# EAGLE board GetWired MCU v1.0 (EAGLE 9.5.1)
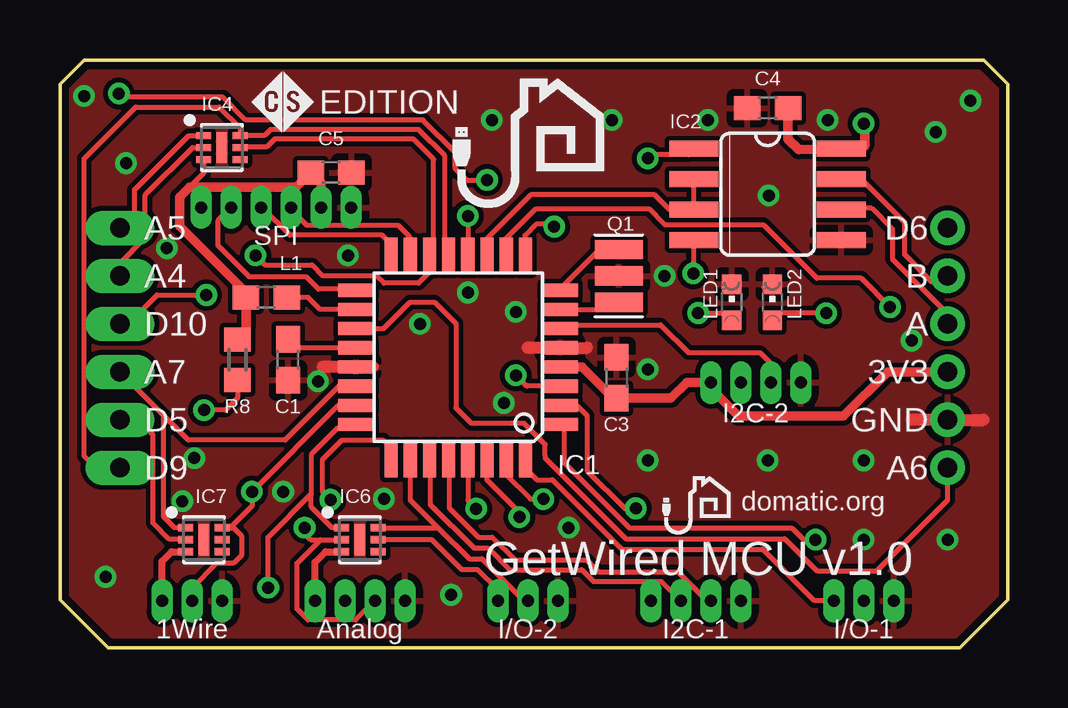
[diagram p0: board, top side]
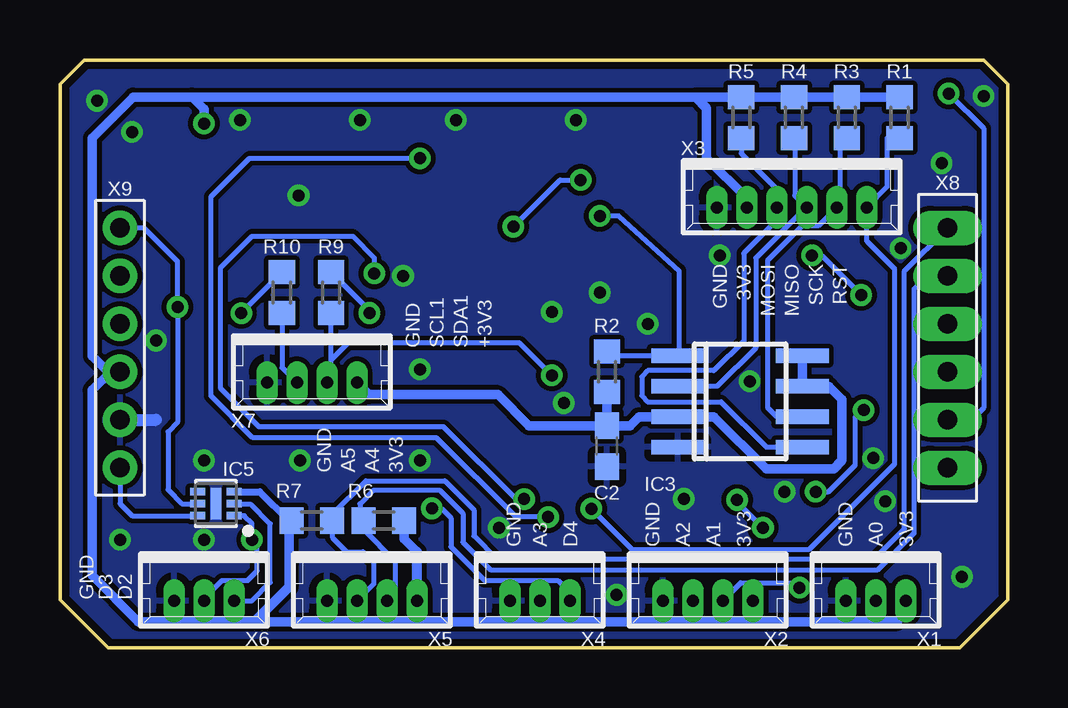
[diagram p1: board, bottom side, seen from below]

Size 39.5 x 24.5 mm. Coordinates in mm from the lower left corner, seen from the top.
Outline: 0,2 0,23.5 1,24.5 38.5,24.5 39.5,23.5 39.5,2 37.5,0 2,0 0,2
Copper layers (1*16): Top 0.035mm / dielectric 1.5mm / Bottom 0.035mm
Design rules "default *": minimum track width 0.2mm, minimum drill 0.5mm, track to track 0.2mm, track to pad 0.2mm, pad to pad 0.2mm, via to via 0.2mm, smd to smd 0.2mm, copper to edge 0.3mm, drill to drill 0.2mm, minimum pad ring 0.2mm, minimum via ring 0.2mm, stop-mask expansion 0.025mm, vias tented up to drill 0.5mm, thermal gap 0.3mm
Net classes: 0 default: width 0.2 mm, drill 0.5 mm, clearance 0.15 mm; 1 zasilanie: width 0.2 mm, drill 0.5 mm, clearance 0.15 mm; 2 230v: width 1.5 mm, drill 1 mm, clearance 2 mm

## Footprints (pad centres in the part's own frame; a part is rotated, then mirrored left to right if it is on the bottom)
C0603 = smd 1.1 x 1: 1 -0.85,0; 2 0.85,0
TQFP32-08-REF = smd 1.5 x 0.55: 1 -4.25,2.8; 2 -4.25,2; 3 -4.25,1.2; 4 -4.25,0.4; 5 -4.25,-0.4; 6 -4.25,-1.2; 7 -4.25,-2; 8 -4.25,-2.8; 17 4.25,-2.8; 18 4.25,-2; 19 4.25,-1.2; 20 4.25,-0.4; 21 4.25,0.4; 22 4.25,1.2; 23 4.25,2; 24 4.25,2.8 | smd 0.55 x 1.5: 9 -2.8,-4.25; 10 -2,-4.25; 11 -1.2,-4.25; 12 -0.4,-4.25; 13 0.4,-4.25; 14 1.2,-4.25; 15 2,-4.25; 16 2.8,-4.25; 25 2.8,4.25; 26 2,4.25; 27 1.2,4.25; 28 0.4,4.25; 29 -0.4,4.25; 30 -1.2,4.25; 31 -2,4.25; 32 -2.8,4.25
SO08 = smd 0.66 x 2.032: 1 -1.905,-3.073; 2 -0.635,-3.073; 3 0.635,-3.073; 4 1.905,-3.073; 5 1.905,3.073; 6 0.635,3.073; 7 -0.635,3.073; 8 -1.905,3.073
SO-08 = smd 0.6 x 2.2: 1 -1.905,-2.6; 2 -0.635,-2.6; 3 0.635,-2.6; 4 1.905,-2.6; 5 1.905,2.6; 6 0.635,2.6; 7 -0.635,2.6; 8 -1.905,2.6
SON50P160X160X65-7T45X130-V2 = smd 0.63 x 0.3: 1 -0.76,0.5; 2 -0.76,0; 3 -0.76,-0.5; 4 0.76,-0.5; 5 0.76,0; 6 0.76,0.5 | smd 0.45 x 1.3: 7 0,0
C1608 = smd 1.1 x 1: 1 -0.85,0; 2 0.85,0
CHIPLED_0603 = smd 0.8 x 0.8: A 0,-0.75; C 0,0.75
CSTCE_V_C = smd 0.8 x 2: GND 0,0; X1 -1.1,0; X2 1.1,0
R0603 = smd 1 x 1.1: 1 -0.85,0; 2 0.85,0
53047-03 = drill 0.5 pad 0.698 long: 1 1.25,0.45; 2 0,0.45; 3 -1.25,0.45
53047-04 = drill 0.5 pad 0.698 long: 1 1.875,0.45; 2 0.625,0.45; 3 -0.625,0.45; 4 -1.875,0.45
53047-06 = drill 0.5 pad 0.698 long: 1 3.125,0.45; 2 1.875,0.45; 3 0.625,0.45; 4 -0.625,0.45; 5 -1.875,0.45; 6 -3.125,0.45
1X6-FEMALE-LONG = drill 0.8 long: 1 -5,0; 2 -3,0; 3 -1,0; 4 1,0; 5 3,0; 6 5,0
HDRV6W50P200_1X6_1200X200X600B = drill 0.8: 1 0,0; 2 2,0; 3 4,0; 4 6,0; 5 8,0; 6 10,0

## Placement (x,y rotation side)
C1  100nF  [C0603]  9.5,12 90 top
C2  100nF  [C0603]  16.7,8.4 90 bottom
C3  100nF  [C0603]  23.2,11.25 270 top
C4  100nF  [C0603]  29.5,22.5 180 top
C5  100nF  [C0603]  11.3,19.8 0 top
IC1  ATMEGA328PB-AU  [TQFP32-08-REF]  16.6,12.1 180 top
IC2  ST3485EBDR  [SO08]  29.5,18.9 270 top
IC3  AT25DN512C-SSHF-B  [SO-08]  11.15,10.26 270 bottom
IC4  RCLAMP3304P.TCT  [SON50P160X160X65-7T45X130-V2]  6.75,20.85 0 top
IC5  RCLAMP3304P.TCT  [SON50P160X160X65-7T45X130-V2]  33,6 180 bottom
IC6  RCLAMP3304P.TCT  [SON50P160X160X65-7T45X130-V2]  12.5,4.5 0 top
IC7  RCLAMP3304P.TCT  [SON50P160X160X65-7T45X130-V2]  6,4.5 0 top
L1  10uH  [C1608]  8.6,14.6 0 top
LED1  LL-S170VC-V1-1B  [CHIPLED_0603]  28,14.4 0 top
LED2  LL-S170VC-V1-1B  [CHIPLED_0603]  29.7,14.4 0 top
Q1  CSTCE8M00G52A-R0  [CSTCE_V_C]  23.3,15.5 90 top
R1  10k  [R0603]  4.5,22.1 90 bottom
R2  56k  [R0603]  16.7,11.5 90 bottom
R3  10k  [R0603]  6.7,22.1 90 bottom
R4  10k  [R0603]  8.9,22.1 90 bottom
R5  10k  [R0603]  11.1,22.1 90 bottom
R6  4.7k  [R0603]  26,5.3 0 bottom
R7  4.7k  [R0603]  29,5.3 180 bottom
R8  4.7k  [R0603]  7.4,12 90 top
R9  1.5k  [R0603]  28.2,14.8 270 bottom
R10  1.5k  [R0603]  30.25,14.8 270 bottom
U$1  [CS2-2.5MM]  8,21.5 0 top
U$2  [LOGO5MMBEZ]  16.35,18.3 0 top
U$3  [LOGO2.5MMNAP0,8]  25.1,4.7 0 top
X1  53047-0310  [53047-03]  5.5,2.4 180 bottom
X2  53047-0410  [53047-04]  12.5,2.4 180 bottom
X3  53047-0610  [53047-06]  9,18.8 180 bottom
X4  53047-0310  [53047-03]  19.5,2.4 180 bottom
X5  53047-0410  [53047-04]  26.5,2.4 180 bottom
X6  53047-0310  [53047-03]  33.5,2.4 180 bottom
X7  53047-0410  [53047-04]  29,11.5 180 bottom
X8  PBMS06S-LF  [1X6-FEMALE-LONG]  2.5,12.5 270 bottom
X9  DS1025-01-1*6P8BV1-B  [HDRV6W50P200_1X6_1200X200X600B]  37,7.5 90 bottom

## Library data of the parts
C1-C5 = resistor; WWW: https://www.tme.eu/pl/en/details/cl10b104jb8nnnc/0603-mlcc-smd-capacitors/samsung/
IC1 = ATMEGA328PB-AU; PACKAGE: http://ww1.microchip.com/downloads/en/DeviceDoc/32L_TQFP_7x7x1_0mm_3BB_C04-21017a.pdf; WWW: https://www.tme.eu/pl/details/atmega328pb-au/rodzina-avr-8-bit/microchip-atmel/
IC2 = maxim; MF: STMicroelectronics; MPN: ST3485EBDR; WWW: https://www.tme.eu/pl/en/details/st3485ebd/rs232-422-485-interfaces-integr-circ/stmicroelectronics/st3485ebdr/
IC3 = microchip; MF: ADESTO; MPN: AT25DN512C-SSHF-B; WWW: https://www.tme.eu/pl/en/details/at25dn512c-sshfb/serial-flash-memories-integrated-circ/adesto/at25dn512c-sshf-b/
IC4-IC7 = RailClamp; WWW: https://www.tme.eu/pl/en/details/rclamp3304p.tct/transil-diodes-arrays/semtech/
L1 = resistor; WWW: https://www.tme.eu/pl/en/details/lqm18fn100m00d/smd-0603-inductors/murata/
LED1 LED2 = led; WWW: https://www.tme.eu/pl/en/details/ll-s170vc-v1-1b/smd-colour-leds/lucky-light/
Q1 = bt_crystal; WWW: https://www.tme.eu/pl/en/details/cstce8m00g52a-r0/smd-ceramic-filters-and-resonators/murata/
R1 R3-R5 = resistor; WWW: https://www.tme.eu/pl/en/details/crcw060310k0jntabc/0603-smd-resistors/vishay/
R2 = resistor; WWW: https://www.tme.eu/pl/en/details/smd0603-56k/0603-smd-resistors/royal-ohm/0603saj0563t5e/
R6-R8 = resistor; WWW: https://www.tme.eu/pl/en/details/wf06p-4k7-5%25/0603-smd-resistors/walsin/wf06p472jtl/
R9 R10 = resistor; WWW: https://www.tme.eu/pl/en/details/smd0603-1k5/0603-smd-resistors/royal-ohm/0603saj0152t5e/
U$1-U$3 = logo domatic
X1 X4 X6 = con-molex; WWW: https://www.tme.eu/pl/en/details/mx-53047-0310/raster-signal-connectors-1-25mm/molex/53047-0310/
X2 X5 X7 = con-molex; WWW: https://www.tme.eu/pl/en/details/mx-53047-0410/raster-signal-connectors-1-25mm/molex/53047-0410/
X3 = con-molex; WWW: https://www.tme.eu/pl/en/details/mx-53047-0610/raster-signal-connectors-1-25mm/molex/53047-0610/
X8 = headers(2mm); WWW: https://www.maritex.com.pl/zlacza/listwy_stykowe/listwy_w_rastrze_2_00mm/listwy_stykowe_zenskie_jednorzedowe_w_rastrze_2_00mm/pbms06s-lf.html
X9 = headers(2mm); WWW: https://www.tme.eu/pl/en/details/zl303-06p/pin-headers/connfly/ds1025-01-1-6p8bv1-b/

## Nets
1WIRE: IC1.23 IC7.6 R8.1 X1.2
+3V3 [zasilanie]: C2.2 C3.2 C4.1 C5.1 IC1.4 IC2.8 IC3.3 IC3.7 IC3.8 IC4.3 IC5.3 IC6.3 IC7.3 L1.1 R1.2 R2.1 R3.2 R4.2 R5.2 R6.2 R7.2 R8.2 X1.3 X2.4 X3.2 X5.4 X7.4 X9.3
A: IC2.6 X9.4
A1: IC1.24 IC6.1 X2.3
A2: IC1.25 IC6.2 X2.2
A3: IC1.26 IC6.6 X4.2
A6: IC1.19 IC5.6 X9.1
A7: IC1.22 IC7.1 X8.4
AREF: C1.2 IC1.20
B: IC2.7 X9.5
D2: IC1.32 IC5.2 X6.3
D3: IC1.1 IC5.1 X6.2
D4: IC1.2 IC6.5 X4.3
D5: IC1.9 IC7.2 X8.5
D6: IC1.10 IC5.5 X9.6
D7: IC1.11 IC2.2 IC2.3
D8: IC1.12 IC3.1 R2.2
D9: IC1.13 IC4.6 X8.6
D10: IC1.14 IC4.5 X8.3
GND [zasilanie]: C1.1 C2.1 C3.1 C4.2 C5.2 IC1.5 IC1.21 IC2.5 IC3.4 IC4.7 IC5.7 IC6.7 IC7.7 LED1.C LED2.C Q1.GND X1.1 X2.1 X3.1 X4.1 X5.1 X6.1 X7.1 X9.2
MISO: IC1.16 IC3.2 R4.1 X3.4
MOSI: IC1.15 IC3.5 R5.1 X3.3
N$1: LED1.A R9.1
N$2: IC1.7 Q1.X1
N$3: IC1.8 Q1.X2
N$4 [zasilanie]: IC1.18 L1.2
N$6: LED2.A R10.1
RESET: IC1.29 R1.1 X3.6
RXD: IC1.30 IC2.1
SCK: IC1.17 IC3.6 R3.1 X3.5
SCL: IC1.28 IC4.1 R7.1 X5.2 X8.1
SCL1: IC1.6 R10.2 X7.2
SDA: IC1.27 IC4.2 R6.1 X5.3 X8.2
SDA1: IC1.3 R9.2 X7.3
TXD: IC1.31 IC2.4

## Tracks (layer width: path | path; a pad name or v marks a point on that pad's centre or on a via)
1WIRE  (via drill 0.5)
  Top 0.2: 7.4,11.19 7.23,11.02 7.25,11 R8.1 7.4,10.4 6.9,9.9 v6,9.9 | X1.2 5.5,2.5 6.51,3.52 7.24,3.52 7.57,3.84 7.57,4.66 7.24,4.99 6.79,4.99 IC7.6 7.1,5 8,5.9 v8,6.5 11.6,10.1 IC1.23
  Bottom 0.2: v8,6.5 7.46,6.5 6.35,7.61 6.35,9.61 6.06,9.9 v6,9.9
+3V3  (via drill 0.5)
  Top 0.2: 21,11.75 IC1.4 | IC4.3 5.99,19.79 5.4,19.2
  Top 0.3: X2.4 10.62,3.55 11.07,4 IC6.3 | X1.3 4.25,3.6 4.65,4 IC7.3
  Top 0.4: R8.2 7.75,13.3 L1.1 7.75,14.8 4.98,17.57 4.98,18.78 5.4,19.2 9.85,19.2 C5.1 10.88,19.38 X3.2 | v33.5,21.85 33.55,21.8 33.55,20.93 33.37,20.75 IC2.8 30.79,20.75 30.35,21.2 C4.1 | IC1.4 21.75,11.7 23.05,10.4 C3.2 25.48,10.4 26.12,11.05 X7.4 27.12,10.8 28.27,9.65 32.65,9.65 34.5,11.5 X9.3
  Bottom 0.2: 29.98,5.3 R7.2
  Bottom 0.3: IC5.3 31.18,6.5 29.98,5.3 | R1.2 4.71,22.74
  Bottom 0.4: 25.01,1.08 31.4,1.08 36.25,1.08 38.16,3.01 38.16,10.73 37.39,11.5 X9.3 37.5,11.5 38.15,12.15 38.15,21.25 36.45,22.95 34,22.95 | 25.01,1.08 24.62,1.48 X5.4 | 25.01,1.08 11.01,1.08 | 11.01,1.08 10.62,1.48 X2.4 | 11.01,1.08 4.61,1.08 4.35,1.34 | 4.35,1.34 4.25,1.45 | X3.2 10.88,18.74 12.55,20.41 12.55,22.5 13,22.95 | 29.95,2.53 29.95,5.2 R7.2 | 4.35,1.34 4.25,1.45 X1.3 | 13,22.95 R5.2 R4.2 R3.2 R1.2 | 24.62,4 25.15,4.53 R6.2 | C2.2 15.75,9.25 15.38,9.62 IC3.3 12.23,9.62 10.06,7.45 7.25,7.45 6.9,7.8 6.9,10.35 7.45,10.89 IC3.7 IC3.8 | C2.2 R2.1 | 34,22.95 13,22.95 | 34,22.95 33.5,22.45 v33.5,21.85 | C2.2 19.95,9.25 21.25,10.55 26.62,10.55 X7.4
  Bottom 0.406: X5.4 24.62,4 | 31.4,1.08 29.95,2.53
A
  Top 0.2: IC2.6 32.62,18.32 33.84,18.32 34.7,17.45 34.7,16.2 37,13.9 X9.4
A1  (via drill 0.5)
  Top 0.2: 10.47,6.4 8.68,4.6 v8.68,2.5 | 10.47,6.4 10.47,8.05 11.57,9.15 12.27,9.15 IC1.24 | IC6.1 11.34,5 10.47,5.87 10.47,6.4
  Bottom 0.2: v8.68,2.5 8.88,2.7 11.12,2.7 X2.3
A2  (via drill 0.5)
  Top 0.2: X2.2 12.32,1.15 10.34,1.15 9.88,1.61 9.88,3.52 10.86,4.5 | 10.86,4.5 IC6.2 | 13.8,7.8 IC1.25 13.8,8.31 13.46,8.65 11.75,8.65 10.95,7.85 10.95,6.48 v11.28,6.16 | v10.2,5 10.2,4.75 10.45,4.5 10.86,4.5
  Bottom 0.2: v10.2,5 11.28,6.08 v11.28,6.16
A3
  Top 0.2: X4.2 19.34,1.95 17.59,3.7 17.06,3.7 15.76,5 | IC1.26 14.6,6.16 15.76,5 | 14.54,7.92 IC1.26 | IC1.26 14.55,7.97 | IC6.6 15.76,5
A6
  Top 0.2: 37,7 X9.1 37,6.15 34.05,3.2 31.55,3.2 30.21,4.54 23.59,4.54 20.22,7.9 20.22,8 20.22,8.46 20.22,8.48 19.35,9.35 17.15,9.35 16.5,10 16.5,13.51 15.61,14.4 14.59,14.4 13.49,13.3 IC1.19
  Bottom 0.2: IC5.6 36.5,5.5 37,6 X9.1
A7
  Top 0.2: 12.42,10.9 IC1.22 11.64,10.9 9.39,8.65 5.35,8.65 4.33,9.67 | IC7.1 4.77,5 4.33,5.44 4.33,9.67 | 4.33,9.67 X8.4
AREF
  Top 0.2: IC1.20 9.5,12.5 C1.2
B
  Top 0.2: IC2.7 33.41,19.54 35.2,17.75 35.2,16.4 36.35,15.25 36.75,15.25 X9.5
D2
  Top 0.2: X6.3 31.45,1.95 29.3,4.1 23.42,4.1 20.53,6.99 19.88,6.99 19.4,7.47 IC1.32
  Bottom 0.2: IC5.2 32.21,5.99 31.56,5.99 30.73,5.16 30.73,2.71 31.5,1.95 X6.3
D3  (via drill 0.5)
  Top 0.2: IC1.1 21,9.08 21,7.72 23.73,4.99 30.51,4.99 31,4.5 v31.5,4.5
  Bottom 0.2: X6.2 33.5,2.05 32.75,2.8 31.67,2.8 31.27,3.2 31.27,4.27 v31.5,4.5 31.5,5.17 31.82,5.5 IC5.1
D4  (via drill 0.5)
  Top 0.2: v24,5.8 23.55,5.8 21.98,7.38 21.98,9.68 21.55,10.1 IC1.2 21,10 | X4.3 18.25,2.4 17.4,3.25 16.75,3.25 15.5,4.5 IC6.5
  Bottom 0.2: v24,5.8 23.6,5.8 23.2,5.4 23.2,4.2 21.8,2.8 18.75,2.8 18.25,2.3 X4.3
D5  (via drill 0.5)
  Top 0.2: v20.6,17.55 20.5,17.65 19.85,17.65 19.38,17.18 19.38,16.3 IC1.9 | X8.5 3.25,9.5 3.88,8.87 3.88,5.2 4.56,4.51 5.21,4.51 IC7.2 | v2.45,23.1 2.61,22.94 6.8,22.94 7.74,22 15.12,22 | 15.15,22 15.12,22 | 15.12,22 16.45,20.67 16.45,20 16.95,19.5 v17.8,19.5
  Bottom 0.2: v2.45,23.1 1,21.65 1,10 1.5,9.5 X8.5 | v20.6,17.55 18.65,19.5 v17.8,19.5
D6  (via drill 0.5)
  Top 0.2: IC1.10 18.6,17.05 19.85,18.3 24.54,18.3 25.21,17.64 29.31,17.64 31.55,15.4 33.4,15.4 v34.6,14.2
  Bottom 0.2: X9.6 36,17.5 34.6,16.1 v34.6,14.2 34.6,9.4 35,9 35,6.58 34.42,6 IC5.5
D7
  Top 0.2: IC1.11 17.8,17.05 19.64,18.89 24.78,18.89 25.4,18.27 IC2.3 IC2.2
D8  (via drill 0.5)
  Top 0.2: v17,18 IC1.12
  Bottom 0.2: R2.2 16.52,12.16 IC3.1 13.7,12.21 13.7,15.73 16.2,18 v17,18
D9
  Top 0.2: X8.6 1.49,7.5 1,7.99 1,20.38 3.16,22.54 6.64,22.54 7.51,21.67 IC4.6 8.53,21.35 8.78,21.6 14.96,21.6 16.05,20.51 16.05,16.43 IC1.13
D10  (via drill 0.5)
  Top 0.2: v8.15,16.35 8.55,15.95 10.5,15.95 10.95,15.5 13.2,15.5 13.51,15.2 14.95,15.2 15.35,15.59 15.35,16.23 IC1.14 15.58,16.46 15.58,20.36 14.74,21.2 8.95,21.2 8.61,20.86 7.59,20.86 IC4.5 | X8.3 2.85,13.5 4.05,14.7 v6.1,14.7
  Bottom 0.2: v8.15,16.35 7.75,16.35 v6.1,14.7
GND  (via drill 0.5)
  Top 0.4: 21.95,12.5 22,12.55
  Top 0.5: 19.5,12.5 IC1.5 21.95,12.5 | 10.95,11.7 IC1.21 13.05,11.7 | 35.5,9.5 X9.2 38.5,9.5
  Bottom 0.5: X9.2 35.5,9.5
  other vias: 37,4.5 25.2,15.5 24.5,11.6 37.95,22.8 19,14 4.45,16.65 2.75,20.2 36.5,21.5 1,23 1.9,2.95 21.2,5 15,13.5 32,22 29.55,18.85 24.5,7.8 17,14.8 16.3,2.2 18.5,10.2 13.5,6.2 5.1,6.1 12,16.35 5.6,7.9 10.75,11.1 27,22 33.5,7.8 33.5,4.5 9.3,6.5 23,22 18,22 29.5,7.8 35.5,12.8
  pour Top (isolate 0.2): 38.5,24.5 1,24.5 0,23.5 0,2 2,0 37.5,0 39.5,2 39.5,23.5
  pour Bottom (isolate 0.2): 38.5,24.5 1,24.5 0,23.5 0,2 2,0 37.5,0 39.5,2 39.5,23.5
MISO
  Top 0.2: X3.4 8.43,18.35 9.59,17.19 13.43,17.19 13.8,16.82 IC1.16
  Bottom 0.2: R4.1 8.88,21.23 8.88,18.85 X3.4 8.4,18.35 10.5,16.25 10.5,12.5 12.11,10.89 IC3.2
MOSI
  Top 0.2: X3.3 9.62,18.27 10.29,17.6 14.11,17.6 14.58,17.13 14.58,16.33 IC1.15
  Bottom 0.2: R5.1 11.1,20.6 9.62,19.12 X3.3 9.62,17.82 11,16.45 11,12.79 12.25,11.54 15,11.54 15.25,11.3 15.25,10.49 15,10.24 11.95,10.24 10.05,8.36 IC3.5
N$1  (via drill 0.5)
  Top 0.2: v26.6,13.95 27.7,13.95 LED1.A
  Bottom 0.2: R9.1 26.6,14.05 v26.6,13.95
N$2
  Top 0.2: IC1.7 23,14.1 Q1.X1
N$3
  Top 0.2: IC1.8 20.89,15 22.5,16.6 Q1.X2
N$4
  Top 0.2: IC1.18 10.85,14.1 10.35,14.6 L1.2
N$6  (via drill 0.5)
  Top 0.2: v31.94,13.94 29.99,13.94 LED2.A
  Bottom 0.2: 30.42,15.4 R10.1 31.94,13.96 v31.94,13.94
RESET  (via drill 0.5)
  Top 0.2: IC1.29 17,6.14 v17.35,5.79
  Bottom 0.2: R1.1 5.03,21.25 5.03,19.2 X3.6 5.88,16.95 4.7,15.78 4.7,7.66 8.26,4.1 15.66,4.1 v17.35,5.79
RXD  (via drill 0.5)
  Top 0.2: IC2.1 26.2,20.55 24.65,20.55 v24.5,20.4 | v19.15,5.44 19.15,5.64 17.8,6.99 IC1.30
  Bottom 0.2: v19.15,5.44 20.5,5.44 23.81,8.75 31.46,8.75 33.2,10.49 33.2,18.8 31.6,20.4 v24.5,20.4
SCK
  Top 0.2: 7.12,18.07 X3.5 6.58,17.8 6.58,16.77 7.9,15.45 10.27,15.45 10.78,14.95 12.37,14.95 IC1.17
  Bottom 0.2: R3.1 7,20.95 7,18.48 X3.5 7.88,17.6 8.55,17.6 10,16.15 10,10 9.62,9.62 IC3.6
SCL
  Top 0.2: X5.2 26.96,1.95 25.77,3.15 22.45,3.15 21.95,3.65 18.98,3.65 18.03,4.6 17.45,4.6 16.23,5.82 16.23,7.89 IC1.28 | IC4.1 5.96,21.34 5.36,21.34 3.1,19.07 3.1,18.1 X8.1
  Bottom 0.2: X8.1 4.3,15.7 4.3,4.96 5.55,3.7 21.3,3.7 22.25,4.65 22.25,5.75 23.45,6.95 26.75,6.95 28.15,5.55 R7.1 28.15,4.6 27.55,4 26.88,4 26.43,3.55 26.43,2.65 X5.2
SCL1
  Top 0.2: IC1.6 21.04,13.45 25.04,13.45 26.19,12.3 29.18,12.3 29.62,11.85 X7.2
  Bottom 0.2: R10.2 30.25,11.68 X7.2
SDA
  Top 0.2: IC1.27 15.43,7.89 15.43,5.97 17.25,4.15 17.84,4.15 18.73,3.25 21.75,3.25 22.25,2.75 25.07,2.75 X5.3 | X8.2 2.5,16.04 3.56,17.1 3.56,18.89 5.53,20.85 IC4.2
  Bottom 0.2: X8.2 3.35,15.5 3.9,14.95 3.9,4.76 5.41,3.25 21.55,3.25 22.7,4.39 22.7,5.6 23.65,6.55 26.45,6.55 27,6 27,5.15 R6.1 26.88,4.97 26.88,4.95 25.52,3.6 25.52,2.3 X5.3
SDA1  (via drill 0.5)
  Top 0.2: IC1.3 19.45,10.9 v19,11.35
  Bottom 0.2: X7.3 28.2,11.22 28.2,12 | 28.2,12 R9.2 | v19,11.35 20.35,12.7 27.5,12.7 28.2,12
TXD  (via drill 0.5)
  Top 0.2: v20.15,6.19 19.61,6.19 18.6,7.2 IC1.31 | IC2.4 26.4,16.92 v26.4,15.6
  Bottom 0.2: v26.4,15.6 26.4,16.25 27.3,17.15 31.5,17.15 32.8,15.85 32.8,10.8 31.2,9.2 23.51,9.2 20.5,6.19 v20.15,6.19

## Text on the board
tNames: EDITION | A5 | SPI | Q1 | D6 | A4 | B | D10 | A | A7 | 3V3 | D5 | I2C-2 | GND | D9 | A6 | GetWired MCU v1.0 | 1Wire | Analog | I/O-2 | I2C-1 | I/O-1
bNames: RST | SCK | MISO | MOSI | 3V3 | GND | +3V3 | SDA1 | SCL1 | GND | 3V3 | A4 | A5 | GND | 3V3 | A0 | GND | 3V3 | A1 | A2 | GND | D4 | A3 | GND | D2 | D3 | GND